# EAGLE board Adafruit VS1053 Breakout (EAGLE 9.1.1)

Size 27.64 x 57.71 mm. Coordinates in mm from the lower left corner, seen from the top.
Outline: 19.81,0 25.09,0 arc90 27.64,2.54 27.64,55.17 arc90 25.09,57.71 2.54,57.71 arc90 0,55.17 0,2.54 arc90 2.54,0 6.1,0 arc90 8.13,2.03 17.78,2.03 arc90 19.81,0
Copper layers (1*16): Top 0.035mm / dielectric 1.5mm / Bottom 0.035mm
Design rules "adafruit *": minimum track width 8mil, minimum drill 15.5mil, track to track 8mil, track to pad 8mil, pad to pad 8mil, via to via 8mil, smd to smd 8mil, copper to edge 10mil, drill to drill 8mil, minimum pad ring 10mil, minimum via ring 8mil, stop-mask expansion 4mil, vias tented up to drill 20mil, thermal gap 10mil

## Footprints (pad centres in the part's own frame; a part is rotated, then mirrored left to right if it is on the bottom)
1X16_ROUND = drill 1 pad 1.676: 1 -19.05,0; 2 -16.51,0; 3 -13.97,0; 4 -11.43,0; 5 -8.89,0; 6 -6.35,0; 7 -3.81,0; 8 -1.27,0; 9 1.27,0; 10 3.81,0; 11 6.35,0; 12 8.89,0; 13 11.43,0; 14 13.97,0; 15 16.51,0; 16 19.05,0
MOUNTINGHOLE_3.0_PLATEDTHIN = drill 3 pad 3.6: P$1 0,0

## Placement (x,y rotation side)
JP2  [1X16_ROUND]  25.4,30.48 270 top
JP3  [1X16_ROUND]  2.54,30.48 270 top
U$50  MOUNTINGHOLE3.0THIN  [MOUNTINGHOLE_3.0_PLATEDTHIN]  2.92,3.81 0 top
U$51  MOUNTINGHOLE3.0THIN  [MOUNTINGHOLE_3.0_PLATEDTHIN]  24.26,3.81 0 top
U$52  MOUNTINGHOLE3.0THIN  [MOUNTINGHOLE_3.0_PLATEDTHIN]  24.26,54.23 0 top
U$53  MOUNTINGHOLE3.0THIN  [MOUNTINGHOLE_3.0_PLATEDTHIN]  2.92,54.23 0 top
U$55  [ADAFRUIT_TEXT_20MM]  24.28,5.33 0 bottom

## Library data of the parts
JP2 JP3 U$55 = microbuilder
U$50-U$53 = microbuilder; BOM: EXCLUDE

## Nets
AGND: JP2.3 JP2.4
DREQ: JP2.6
GND: JP2.5 JP2.9
GPIO0: JP3.6
GPIO1: JP3.7
GPIO2: JP3.8
GPIO3: JP3.9
GPIO4: JP3.10
GPIO5: JP3.11
GPIO6: JP3.12
GPIO7: JP3.13
L_OUT: JP2.2
LINE2: JP3.1
MIC_N: JP3.3
MIC_P: JP3.2
MISO: JP2.10
MOSI_5V: JP2.11
R_OUT: JP2.1
RST_5V: JP2.13
RX_5V: JP3.15
SCLK_5V: JP2.12
SD_DETECT: JP3.16
SDCS_5V: JP2.15
TX: JP3.14
VIN: JP2.7
XDCS_5V: JP2.16

## Tracks (layer width: path | path; a pad name or v marks a point on that pad's centre or on a via)
AGND  (1 unrouted)
GND  (1 unrouted)

## Text on the board
tPlace: VS1053B AUDIO | v2 | ROUT | LINE2 | LOUT | MIC+ | AGND | MIC- | AGND | AGND | GND | 3V3 | DREQ | 0 | VCC | 1 | 3V3 | 2 | GND | 3 | MISO | 4 | MOSI | 5 | SCLK | 6 | 7 | RST | CS | TX | SDCS | RX | SD | XDCS | CD | 5V | SAFE
bPlace: OGG, MP3, AAC, WMA, FLAC, MIDI | VS1053B Audio Codec | 3.3V | 3.3 - 5V | OK for use w/powered speakers | LOUT/ROUT: 16Ω Stereo Headphone/Line Out | RX/TX SERIAL: 3-5V safe | SPI: 3-5V safe | GPIO: | VCC: | Supports: